# Altium PCB PCB1.PcbDoc
Units mil, origin at the board's own origin, x right, y up, seen from the top; angles counter-clockwise.
Board outline 2045 x 750 mil, 2 copper layers (Top Layer, Bottom Layer); 49 components, 40 nets, 164 pads, 21 vias.
Unrouted connection lines stored in the file: 4.
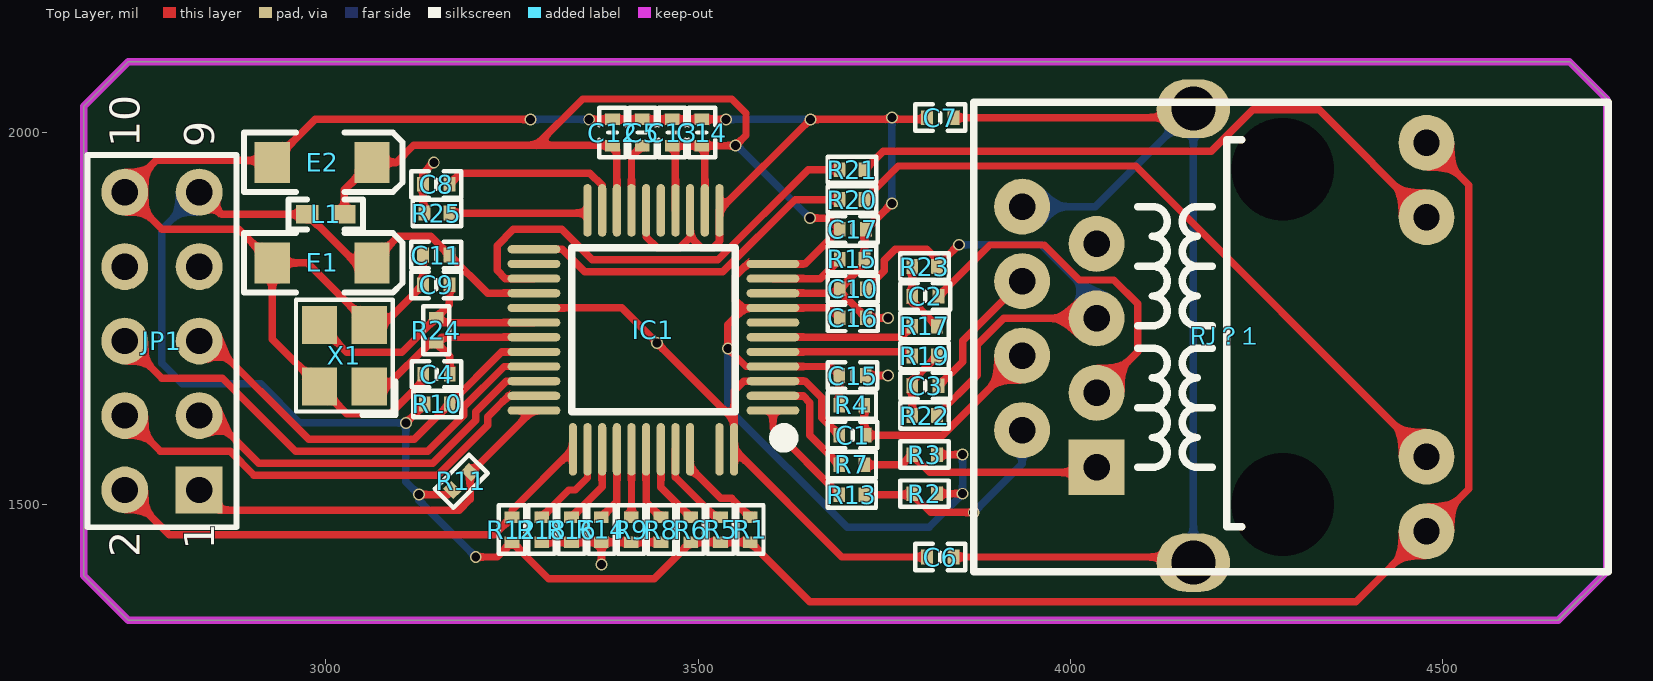
[diagram p0: Top Layer view]
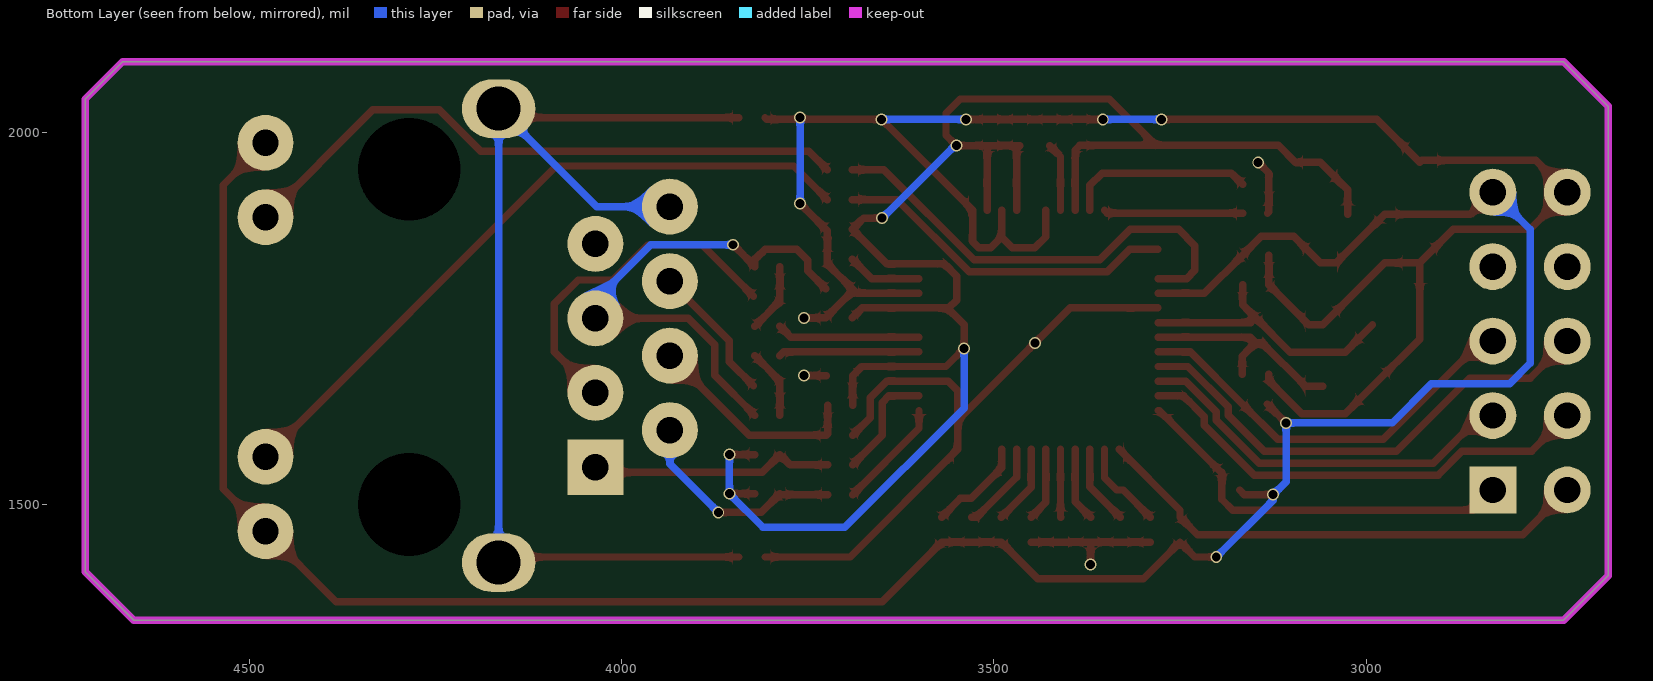
[diagram p1: Bottom Layer view, seen from below]

## Layer stack, top to bottom
Top Solder: solder mask 0.4, Solder Resist, Dk 3.5
Top Layer: signal copper 1.4
Dielectric 1: dielectric 12.6, FR-4, Dk 4.8
Bottom Layer: signal copper 1.4
Bottom Solder: solder mask 0.4, Solder Resist, Dk 3.5

## Board outline
2675,1405 2735,1345 4655,1345 4720,1410 4720,2045 4670,2095 2735,2095 2675,2035

## Design rules (kind name [scope] priority, off if disabled: settings)
Clearance [All] p1: gap=6 ignorepadtopadclearanceinfootprint=FALSE
PolygonConnect [All] p1: connectstyle=Relief reliefconductorwidth=10 reliefentries=4 polygonreliefangle="90 Angle" airgapwidth=10
RoutingVias [All] p1: holewidth=28 width=50 viastyle="Through Hole" minholewidth=28 minwidth=50 maxholewidth=28 maxwidth=50
SolderMaskExpansion [All] p1: expansion=4
Width [All] p1: maxlimit=100 minlimit=6 preferedwidth=10
30 further rules are at their usual default settings.

## Classes and differential pairs
component class Sheet1: C1 C2 C3 C4 C5 C6 C7 C8 C9 C10 C11 C12 C13 C14 C15 C16 C17 E1 E2 IC1 JP1 L1 R2 R3 R4 R5 R6 R8 R9 R10 R11 R12 R15 R16 R17 R18 R19 R20 R21 R22 R23 R24 R25 X1

## Components (designator, comment, footprint, x,y, rotation, side; value= is the part's Value field where it differs from the comment)
C1 "22nF" "C 0402_L" 3707.28,1593.66 r180 top
C2 "6.8nF" "C 0402_L" 3805,1780 r180 top
C3 "6.8nF" "C 0402_L" 3805,1660 r180 top
C4 "18pF" "C 0402_L" 3148.73,1675.46 r0 top
C5 "4.7uF" "C 0402_L" 3425,2000 r90 top
C6 "100nF" "C 0402_L" 3825,1430 r0 top
C7 "100nF" "C 0402_L" 3825,2020 r0 top
C8 "10nF" "C 0402_L" 3148.31,1930.46 r180 top
C9 "18pF" "C 0402_L" 3148.31,1795.46 r0 top
C10 "10nF" "C 0402_L" 3707.71,1790 r180 top
C11 "100nF" "C 0402_L" 3148.31,1835.45 r0 top
C12 "100nF" "C 0402_L" 3385,2000 r90 top
C13 "100nF" "C 0402_L" 3465,2000 r90 top
C14 "100nF" "C 0402_L" 3505,2000 r90 top
C15 "100nF" "C 0402_L" 3707.28,1673.66 r0 top
C16 "100nF" "C 0402_L" 3707.71,1751.18 r0 top
C17 "100nF" "C 0402_L" 3707.71,1870 r0 top
E1 "10uF/16V" "CD A(3216)" 2995,1825 r180 top
E2 "10uF/16V" "CD A(3216)" 2995,1960 r180 top
IC1 "W5500" LQFP48-7*7 3440,1735 r90 top
JP1 "Header 5X2" HDR2.54-LI-2x5P 2780,1720 r90 top
L1 "120" "L 0402" 3000,1890 r0 top
R1 "10K" "R 0402_L" 3570,1467.71 r270 top (schematic designator R23)
R2 "49R9 1%" "R 0402_L" 3803.04,1515 r0 top
R3 "49R9 1%" "R 0402_L" 3803.04,1567.5 r0 top
R4 "10 1%" "R 0402_L" 3707.28,1633.66 r180 top
R5 "10K" "R 0402_L" 3530,1467.71 r270 top
R6 "10K" "R 0402_L" 3490,1467.71 r270 top
R7 "0R" "R 0402_L" 3707.28,1553.66 r180 top (schematic designator R9)
R8 "10K" "R 0402_L" 3450,1467.71 r270 top
R9 "10K" "R 0402_L" 3410,1467.71 r270 top
R10 "10K" "R 0402_L" 3150.69,1635.46 r180 top
R11 "10K" "R 0402_L" 3182.53,1532.52 r225 top
R12 "10K" "R 0402_L" 3250,1467.71 r270 top
R13 "0R" "R 0402_L" 3707.28,1513.66 r180 top (schematic designator R18)
R14 "10K" "R 0402_L" 3370,1467.71 r270 top (schematic designator R22)
R15 "12.4K 1%" "R 0402_L" 3707.71,1830 r180 top
R16 "10K" "R 0402_L" 3330,1467.71 r270 top
R17 "0R" "R 0402_L" 3805,1740 r180 top
R18 "10K" "R 0402_L" 3289.85,1467.71 r270 top
R19 "0R" "R 0402_L" 3805,1700 r180 top
R20 "330" "R 0402_L" 3707.71,1910 r180 top
R21 "330" "R 0402_L" 3707.71,1950 r180 top
R22 "82 1%" "R 0402_L" 3803.04,1620 r0 top
R23 "82 1%" "R 0402_L" 3805,1820 r180 top
R24 "1M" "R 0402_L" 3148.31,1735.45 r270 top
R25 "10K" "R 0402_L" 3148.31,1891.87 r0 top
RJ？1 "HR911105A" RJ-45A12 4285,1725.45 r90 top
X1 "25M" "OSC 3225-4P" 3025,1700.45 r90 top

## Footprints (in the part's own frame and the unit in brackets; to place one, negate y for a bottom-side part, rotate by r counter-clockwise, add the part's x,y. Pads: shape width x height; smd on the part's side, far side on the other; paste and mask are expansions set on the pad)
"C 0402_L" [mm] "无极性贴片电容         淘宝ID:黄晶宝石"
  rect 0.4x0.5 smd: 1(-0.45,0) 2(0.45,0)
  silkscreen extent -0.85,-0.45 0.85,0.45, body extent -0.5,-0.26 0.5,0.26, height 0.53
"CD A(3216)" [mm] "长3.2mm，宽1.6mm，厚1.6mm      淘宝ID:黄晶宝石"
  rect 1.2x1.4 smd: 1(-1.7,0) 2(1.7,0)
  silkscreen extent -2.74,-1.02 2.67,1.02, body extent -1.6,-0.8 1.6,0.8, height 1.6
HDR2.54-LI-2x5P [mm] "双排排针，5x2脚 淘宝ID:黄晶宝石   店铺网址:https://shop463601444.taobao.com"
  rect 1.6x1.6 hole 0.9: 1(-5.08,-1.27)
  round 1.6 hole 0.9: 2(-5.08,1.27) 3(-2.54,-1.27) 4(-2.54,1.27) 5(0,-1.27) 6(0,1.27) 7(2.54,-1.27) 8(2.54,1.27) 9(5.08,-1.27) 10(5.08,1.27)
  silkscreen extent -6.35,-2.54 6.35,2.54, body extent -6.35,-2.54 6.35,2.54, height 8.5
"L 0402" [mil] "小功率贴片电感        淘宝ID:黄晶宝石"
  rect 30x25 smd: 1(-25,0) 2(25,0)
  silkscreen extent -50,-20 50,20, body extent -20,-10 20,10, height 20
LQFP48-7*7 [mm] "7x7mm，0.5mm        淘宝ID:黄晶宝石"
  oval 0.279x1.8 smd: 1(-2.75,-4.075) 2(-2.25,-4.075) 3(-1.75,-4.075) 4(-1.25,-4.075) 5(-0.75,-4.075) 6(-0.25,-4.075) 7(0.25,-4.075) 8(0.75,-4.075) 9(1.25,-4.075) 10(1.75,-4.075) 11(2.25,-4.075) 25(2.75,4.075) 26(2.25,4.075) 27(1.75,4.075) 28(1.25,4.075) 29(0.75,4.075) 30(0.25,4.075) 31(-0.25,4.075) 32(-0.75,4.075) 33(-1.25,4.075) 34(-1.75,4.075) 35(-2.25,4.075) 36(-2.75,4.075)
  oval 1.8x0.279 smd: 14(4.075,-2.25) 15(4.075,-1.75) 16(4.075,-1.25) 17(4.075,-0.75) 18(4.075,-0.25) 19(4.075,0.25) 20(4.075,0.75) 21(4.075,1.25) 22(4.075,1.75) 23(4.075,2.25) 37(-4.075,2.75) 38(-4.075,2.25) 39(-4.075,1.75) 40(-4.075,1.25) 41(-4.075,0.75) 42(-4.075,0.25) 43(-4.075,-0.25) 44(-4.075,-0.75) 45(-4.075,-1.25) 47(-4.075,-2.25) 48(-4.075,-2.75)
  silkscreen extent -3.93,-4.69 2.79,2.79, body extent -4.5,-4.5 4.5,4.5, height 1.45
"OSC 3225-4P" [mm] "3.2*2.5*0.7mm(长宽高)                         淘宝ID:黄晶宝石"
  rect 1.3x1.2 smd: 1(-1.05,-0.85) 2(1.05,-0.85) 3(1.05,0.85) 4(-1.05,0.85)
  silkscreen extent -2.03,-1.75 1.91,1.65, body extent -1.6,-1.25 1.6,1.25, height 0.7
"R 0402_L" [mm] "1/16W贴片电阻     淘宝ID:黄晶宝石"
  rect 0.4x0.5 smd: 1(-0.4,0) 2(0.45,0)
  silkscreen extent -0.8,-0.45 0.85,0.45, body extent -0.5,-0.25 0.5,0.25, height 0.3
RJ-45A12 [mm] "网线接口"
  oval 2x2.5 hole 1.5: 0(-7.695,3.05) 0(7.785,3.05)
  round 3.302 hole 3.5: 0(-5.715,0) 0(5.715,0)
  rect 1.905x1.905 hole 0.9: 1(-4.445,6.35)
  round 1.905 hole 0.9: 2(-3.175,8.89) 3(-1.905,6.35) 4(-0.635,8.89) 5(0.635,6.35) 6(1.905,8.89) 7(3.175,6.35) 8(4.445,8.89) 9(-6.625,-4.9) 10(-4.085,-4.9) 11(4.085,-4.9) 12(6.625,-4.9)
  silkscreen extent -8,-11.1 8,10.54, body extent -7.97,-10.93 7.91,10.47, height 1.5

## Part data
C1 C2 C3 C4 C5 C6 C7 C8 C9 C10 C11 C12 C13 C14 C15 C16 C17: library part C, "贴片电容"
E1 E2: library part CT, "贴片钽电容"
IC1: "网口芯片"
JP1: "5*2P接插件"
L1: library part L, "小功率贴片电感"
R1 R2 R3 R4 R5 R6 R7 R8 R9 R10 R11 R12 R13 R14 R15 R16 R17 R18 R19 R20 R21 R22 R23 R24 R25: library part R, "贴片电阻"
RJ？1: "带灯以太网接口"
X1: library part XTAL-4P, "4脚无源晶振"

## Via types
v1: diameter 16, hole 12, Top Layer to Bottom Layer, tented both sides, 21 vias

## Nets (pads, with @x,y where several pads share a name; then routed paths per layer and width w, separated by ;. In a path a pad name is that pad's centre, name@x,y a point inside that pad or via, vN(x,y) a via of type N, cw(c..) or ccw(c..) an arc to the next point about the centre after c; other vN are vias at no path point)
3.3V: C11.2 E1.1 IC1.28 JP1.9 L1.1 R1.2 R5.2 R6.2 R10.2 R11.2 R12.2 RJ？1.9 RJ？1.12 | length 3415.8
  Top Layer w10: JP1.9 2860,1890 L1.1 3040,1825 E1.1 3097.38,1860.45 3141.02,1860.45 C11.2 3217.26,1784.21 IC1.28 ; v1(3107.52,1610) R10.2 ; v1(3125,1513.66) 3163.66,1513.66 R11.2 ; v1(3201.32,1430) 3230,1430 R12.2 3299,1401 3441,1401 R6.2 R5.2 R1.2 3650,1370 4383.29,1370 RJ？1.9 4535,1521.71 4535,1929.19 RJ？1.12
  Bottom Layer w10: JP1.9 2780,1870 2780,1690 2807.5,1662.5 2912.5,1662.5 2965,1610 v1(3107.52,1610) 3107.52,1531.14 v1(3125,1513.66) 3125,1506.32 v1(3201.32,1430)
3.3V-A: C12.1 C13.1 C14.1 C15.1 C16.1 C17.1 E2.1 IC1.4 IC1.8 IC1.11 IC1.15 IC1.17 IC1.21 L1.2 R2.2 R3.2 R4.2 | length 2538
  Top Layer w10: L1.2 3025,1923.07 E2.1 3095,1960 3117.74,1982.74 3282.74,1982.74 ; IC1.21 3390.79,1976.5 C12.1 3384.55,1982.74 3282.74,1982.74 ; IC1.17 3469.53,1977.76 C13.1 C14.1 ; IC1.15 3508.9,1978.39 C14.1 ; v1(3650,1885) 3675,1885 C17.1 3643.58,1823.58 IC1.11 3566.47,1823.58 3550,1807.12 3550,1775 3560.47,1764.53 3562.8,1764.53 ; R4.2 C15.1 3677.44,1685.79 IC1.4 3564.21,1685.79 v1(3540,1710) 3540,1741.73 3562.8,1764.53 ; C16.1 3676.65,1764.53 IC1.8 3562.8,1764.53 ; R2.2 v1(3855,1515) ; R3.2 v1(3855,1567.5) ; 3282.74,1982.74 3345,2045 3545,2045 3564.21,2025.79 3564.21,1996.5 v1(3550,1982.28) C14.1
  Bottom Layer w10: v1(3540,1710) 3540,1630 3700,1470 3810,1470 v1(3855,1515) v1(3855,1567.5) ; v1(3550,1982.28) 3552.72,1982.28 v1(3650,1885)
ACTLED: IC1.27 R21.2 | length 623.4
  Top Layer w10: IC1.27 3241.1,1803.9 3230,1815 3230,1848.11 3251.89,1870 3316.73,1870 3357.73,1829 3526.63,1829 3647.63,1950 R21.2
GND: C1.2 C4.1 C5.2 C6.1 C7.1 C8.2 C9.1 C10.2 C11.1 C12.2 C13.2 C14.2 C15.2 C16.2 C17.2 E1.2 E2.2 IC1.3 IC1.9 IC1.14 IC1.16 IC1.19 IC1.29 IC1.48 JP1.10 R8.2 R9.2 R14.2 R15.1 R16.2 R18.2 R25.1 X1.2 X1.4 | length 4088.1
  Top Layer w10: C11.1 C9.1 3076.93,1741.79 X1.2 2975.26,1825 E1.2 ; C4.1 3131.01,1666.89 3086.64,1622.52 3028.13,1622.52 X1.4 2928.07,1722.58 E1.2 ; R25.1 3130.59,1893.83 C8.2 3130.59,1945.59 v1(3145,1960) ; v1(3275,2017.71) 2985.78,2017.71 E2.2 2925.57,1962.5 2772.5,1962.5 JP1.10 2780,1870 2883.07,1870 E1.2 ; IC1.29 3397.65,1764.53 v1(3445,1717.18) 3548.27,1613.91 ; R18.2 R16.2 R14.2 ; v1(3353.7,2017.71) C12.2 C5.2 C13.2 C14.2 v1(3537.28,2017.71) ; v1(3370,1420) R14.2 ; IC1.19 3430.16,1859.68 3444.84,1845 3475,1845 3489.21,1859.21 3489.21,1859.68 ; R8.2 R9.2 R14.2 ; IC1.16 3489.21,1859.68 ; IC1.9 3684.21,1784.21 C10.2 ; C1.2 3666,1617.23 3666,1644 3643.9,1666.1 IC1.3 3561.1,1666.1 3548.27,1653.27 3548.27,1613.91 ; C15.2 v1(3755,1673.66) ; v1(3755,1751.17) C16.2 3690,1786.6 C10.2 ; v1(3760,1904.57) C17.2 3723.46,1868.03 R15.1 3723.46,1823.46 C10.2 ; C6.1 3692.82,1430 IC1.48 3548.27,1613.91 ; C7.1 3805,2017.71 v1(3650.85,2017.71) IC1.14 3528.58,1853.58 3520,1845 3503.9,1845 3489.21,1859.68
  Bottom Layer w10: v1(3275,2017.71) v1(3353.7,2017.71) ; v1(3537.28,2017.71) v1(3650.85,2017.71) ; v1(3760,1904.57) v1(3760,2020)
LINKLED: IC1.25 R20.2 | length 463.2
  Top Layer w10: IC1.25 3317.37,1843.27 3347.64,1813 3533.25,1813 3630.25,1910 R20.2
NetC1_1: C1.1 R4.1 RJ？1.4 | length 295.1
  Top Layer w10: R4.1 3723.03,1595.63 C1.1 3828.21,1593.66 RJ？1.4
NetC2_1: C2.1 RJ？1.3 | length 470.9
  Top Layer w10: C2.1 3891.67,1848.95 3964.68,1848.95 4011.68,1801.95 4058.05,1801.95 4090,1770 4090,1705.45 RJ？1.3
NetC2_2: C2.2 R17.1 R23.2 | length 93.9
  Top Layer w10: R23.2 C2.2 3787.29,1773.47 R17.1
NetC3_1: C3.1 RJ？1.6 | length 189.8
  Top Layer w10: C3.1 3855,1692.28 3855,1720.45 RJ？1.6 RJ？1.6@3935,1797.63
NetC3_2: C3.2 R19.1 R22.1 | length 93.9
  Top Layer w10: R22.1 C3.2 3787.29,1666.54 R19.1
NetC4_2: C4.2 IC1.31 R24.2 X1.1 | length 298.2
  Top Layer w10: X1.1 3081.4,1659.11 3140.02,1717.74 R24.2 ; C4.2 3166.44,1699.6 R24.2 ; IC1.31 3155.72,1725.16 R24.2
NetC5_1: C5.1 IC1.20 | length 92.9
  Top Layer w10: IC1.20 3410.47,1967.76 C5.1
NetC6_2: C6.2 C7.2 RJ？1.0@4164.92,1422.49 RJ？1.0@4164.92,2031.94 RJ？1.8 | length 1546.3
  Top Layer w10: C6.2 4157.42,1430 RJ？1.0@4164.92,1422.49 ; C7.2 4152.98,2020 RJ？1.0@4164.92,2031.94
  Bottom Layer w10: RJ？1.8 4033.43,1900.45 4164.92,2031.94 RJ？1.0@4164.92,1422.49
NetC8_1: C8.1 IC1.22 | length 251.7
  Top Layer w10: C8.1 3181.02,1945.45 3354.68,1945.45 3371.1,1929.03 IC1.22
NetC9_2: C9.2 IC1.30 R24.1 X1.3 | length 376.4
  Top Layer w10: X1.3 3028.13,1705.2 3102.3,1705.2 R24.1 ; C9.2 3166.02,1768.92 R24.1 ; IC1.30 3154.66,1744.84 R24.1
NetC10_1: C10.1 R22.2 R23.1 RJ？1.5 | length 714.5
  Top Layer w10: C10.1 3750,1814.57 3750,1828.63 3764.63,1843.27 3806.73,1843.27 3820.75,1829.25 R23.1 v1(3850,1849.26) ; R22.2 3875,1674.25 3875,1715 3910.45,1750.45 RJ？1.5
  Bottom Layer w10: v1(3850,1849.26) 3960.74,1849.26 4035,1775 RJ？1.5
NetIC1_10: IC1.10 R15.2 | length 100.4
  Top Layer w10: IC1.10 3663.9,1803.9 R15.2
NetIC1_23: IC1.23 R25.2 | length 186.9
  Top Layer w10: R25.2 3347.84,1891.87 IC1.23
NetIC1_38: IC1.38 R18.1 | length 121.6
  Top Layer w10: R18.1 3326.38,1520 3335,1520 3351.42,1536.42 IC1.38
NetIC1_39: IC1.39 R16.1 | length 108.1
  Top Layer w10: R16.1 3371.1,1524.57 IC1.39
NetIC1_40: IC1.40 R14.1 | length 99.7
  Top Layer w10: R14.1 3390.79,1504.25 IC1.40
NetIC1_41: IC1.41 R9.1 | length 91.3
  Top Layer w10: R9.1 3410.47,1483.94 IC1.41
NetIC1_42: IC1.42 R8.1 | length 99.3
  Top Layer w10: IC1.42 3430.16,1503.31 R8.1
NetIC1_43: IC1.43 R6.1 | length 107.7
  Top Layer w10: IC1.43 3449.84,1523.62 R6.1
NetIC1_44: IC1.44 R5.1 | length 120.1
  Top Layer w10: IC1.44 3469.53,1537.21 3523.27,1483.46 R5.1
NetIC1_45: IC1.45 R1.1 | length 132.9
  Top Layer w10: IC1.45 3489.21,1550.04 3530.59,1508.66 3544.8,1508.66 R1.1
NetR2_1: R2.1 R13.1 RJ？1.2 | length 295.2
  Top Layer w10: R13.1 3785.95,1513.66 R2.1 3812.28,1490 v1(3870,1490)
  Bottom Layer w10: v1(3870,1490) 3935,1555 RJ？1.2
NetR3_1: R3.1 R7.1 RJ？1.1 | length 330.4
  Top Layer w10: R7.1 3773.45,1553.66 R3.1 3811.12,1543.66 4028.21,1543.66 RJ？1.1
NetR20_1: R20.1 RJ？1.10 | length 934.8
  Top Layer w10: R20.1 3768.46,1955 4087.54,1955 RJ？1.10
NetR21_1: R21.1 RJ？1.11 | length 847.4
  Top Layer w10: R21.1 3748.46,1975 4189.06,1975 4244.41,2030.35 4333.83,2030.35 RJ？1.11
PB4/RSTn: IC1.37 JP1.2 R12.1 | length 679.5
  Top Layer w10: JP1.2 2790,1460 3226.54,1460 R12.1 3250,1492.82 IC1.37
PB5/INTn: IC1.36 JP1.1 R11.1 | length 538.7
  Top Layer w10: JP1.1 2857.18,1492.82 3179.26,1492.82 3193.66,1507.22 R11.1@3193.66,1542.38 ; R11.1@3193.31,1542.03 R11.1@3193.66,1542.38 ; R11.1 R11.1@3193.66,1542.38 ; IC1.36 3278.01,1626.73 R11.1@3193.66,1542.38
PB9/SCSn: IC1.32 JP1.5 R10.1 | length 552.9
  Top Layer w10: JP1.5 2845,1720 2977,1588 3118.79,1588 3166.25,1635.46 R10.1 3236.46,1705.47 IC1.32
PB13/SCLK: IC1.33 JP1.6 | length 664.7
  Top Layer w10: JP1.6 2780,1670 2861.29,1670 2959.29,1572 3137,1572 3185.32,1620.32 3185.32,1631.71 3239.4,1685.79 IC1.33
PB14/MISO: IC1.34 JP1.3 | length 528.3
  Top Layer w10: JP1.3 2846.18,1620 2910.18,1556 3143.63,1556 3201.32,1613.69 3201.32,1625.08 3242.34,1666.1 IC1.34
PB15/MOSI: IC1.35 JP1.4 | length 633.4
  Top Layer w10: JP1.4 2778,1572 2871.55,1572 2903.55,1540 3150.25,1540 3217.32,1607.06 3217.32,1618.45 3245.28,1646.42 IC1.35
RXN: IC1.5 R19.2 | length 189.1
  Top Layer w10: IC1.5 3781.82,1705.47 R19.2
RXP: IC1.6 R17.2 | length 193
  Top Layer w10: IC1.6 3772.44,1725.16 R17.2
TXN: IC1.1 R13.2 | length 150
  Top Layer w10: IC1.1 3600.45,1602.78 R13.2
TXP: IC1.2 R7.2 | length 153.4
  Top Layer w10: IC1.2 3640.96,1646.42 3650,1637.37 3650,1593.23 R7.2
pads on no net: IC1.7 IC1.18 IC1.26 IC1.47 JP1.7 JP1.8 RJ？1.0@4285,1500.45 RJ？1.0@4285,1950.45 RJ？1.7

## Keep-outs
Keep-Out Layer:
  the board outline again, w10

## Text inside footprints (layer, text, board x,y; h text height)
JP1: Top Overlay "10" at 2750,1980 h40 r90; Top Overlay "9" at 2850,1980 h40 r90; Top Overlay "1" at 2850,1440 h40 r90; Top Overlay "2" at 2750,1430 h40 r90